# Altium PCB shkb.PcbDoc (part 1 of 3)
Units mil, origin at the board's own origin, x right, y up, seen from the top; angles counter-clockwise.
Board outline 5570.88 x 1417.33 mil, 4 copper layers (COMPONENT, GND1, GND2, SIGNAL), stack 63.78 mil thick; 142 components, 135 nets, 597 pads, 700 vias.
Unrouted connection lines stored in the file: 1.
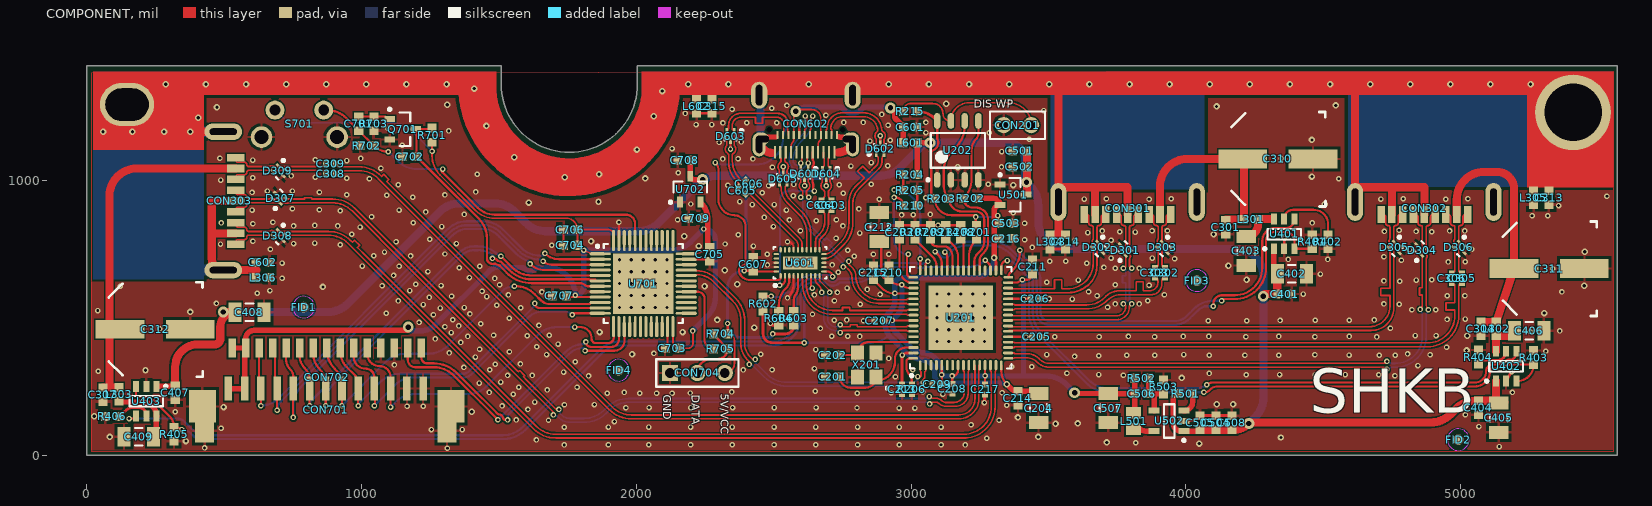
[diagram p0: COMPONENT view]
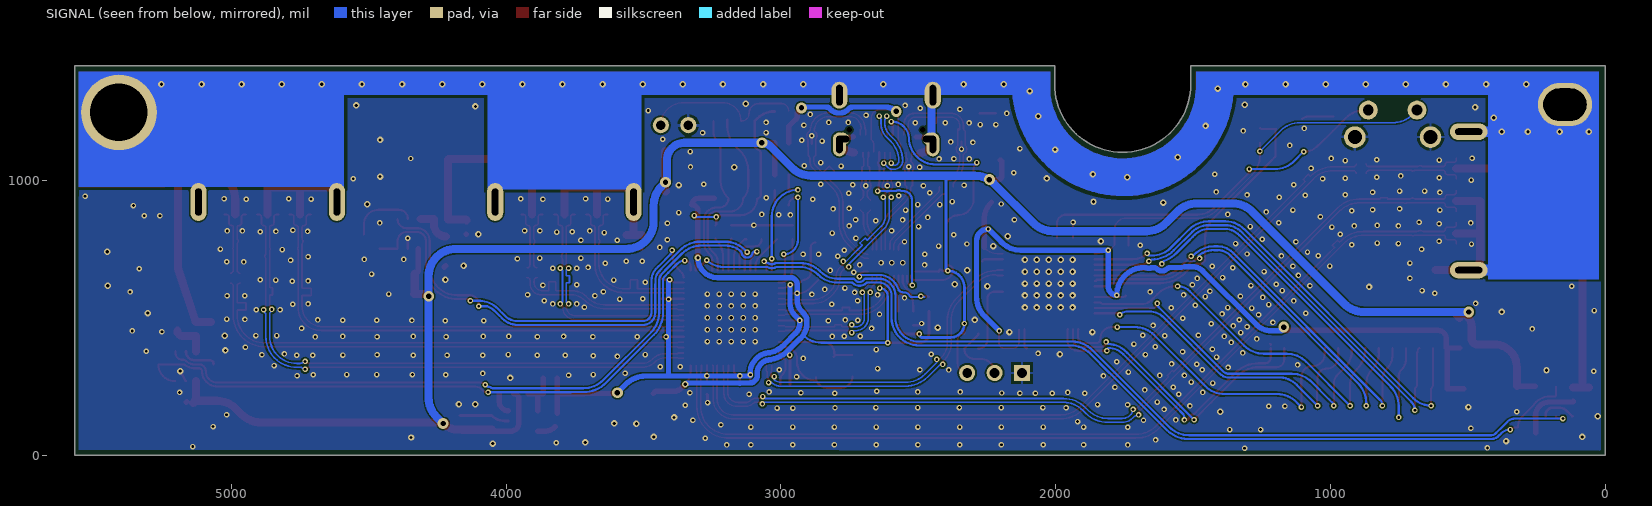
[diagram p1: SIGNAL view, seen from below]
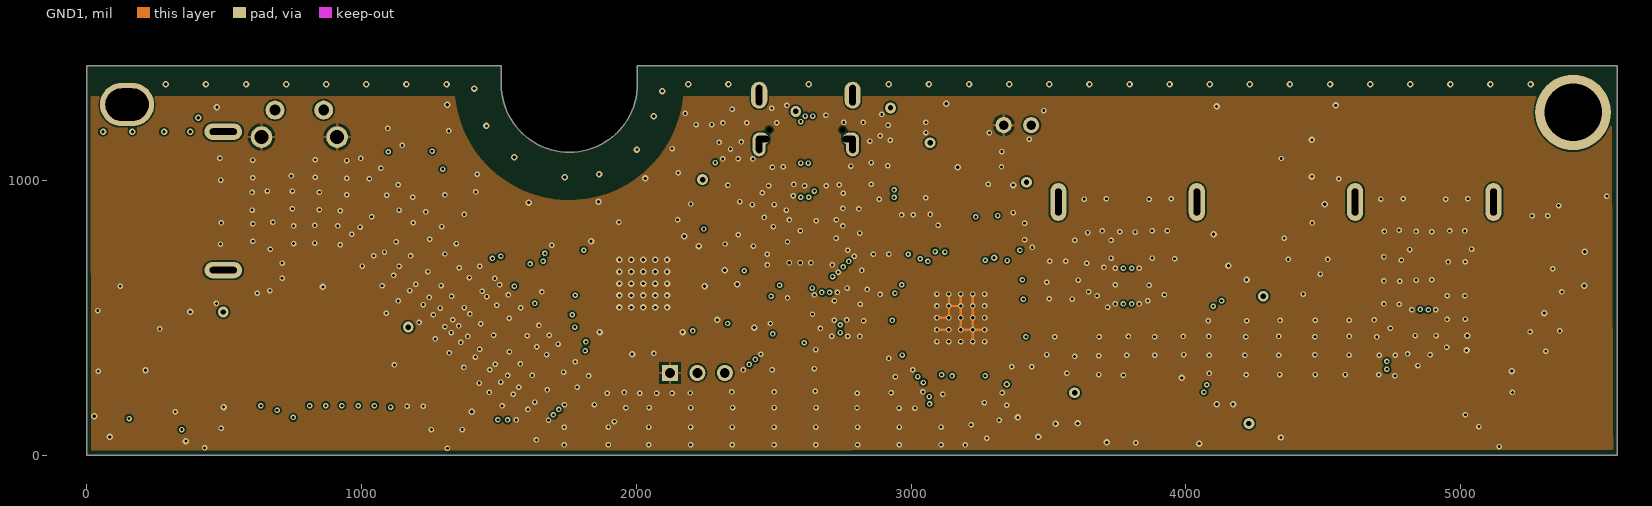
[diagram p2: GND1]
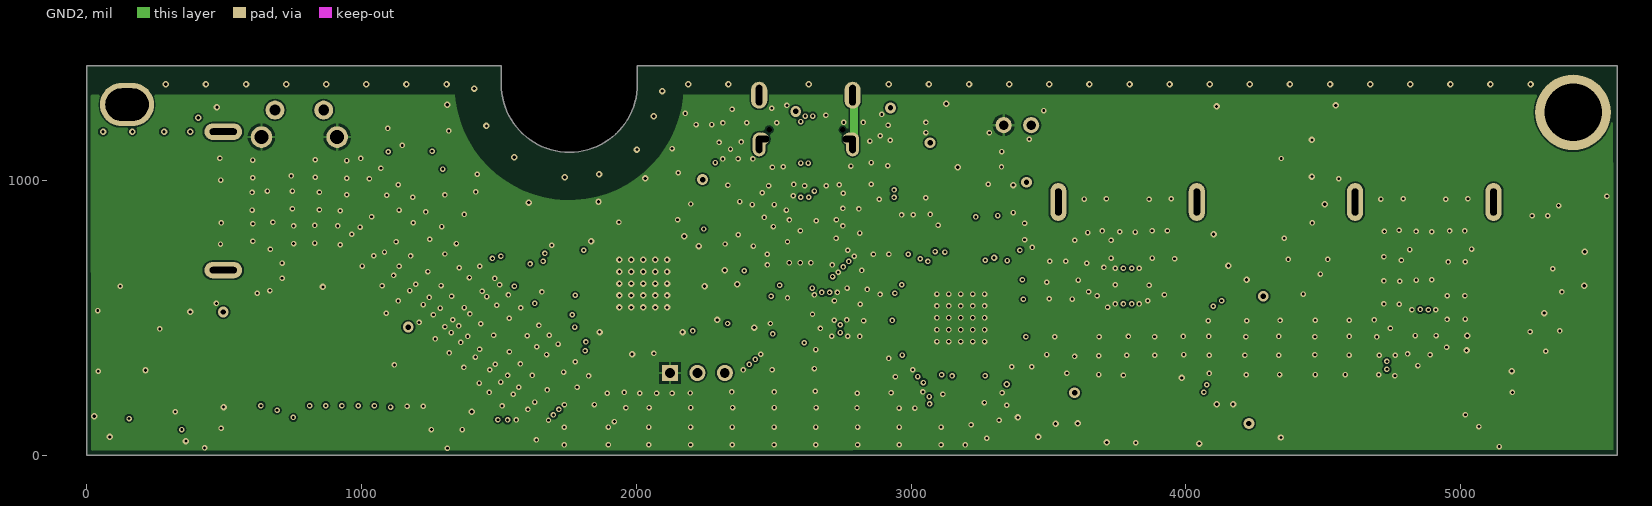
[diagram p3: GND2]

## Layer stack, top to bottom
Top Solder: solder mask 0.4, Solder Resist, Dk 3.5
COMPONENT: signal copper 1.378
Dielectric 1: core 5.5118, FR-4, Dk 4.6
GND1: signal copper 1.378
Dielectric 6: core 47.2441, Dk 4.6
GND2: signal copper 1.378
Dielectric 4: core 5.5118, Dk 4.6
SIGNAL: signal copper 1.378
Bottom Solder: solder mask 0.4, Solder Resist, Dk 3.5

## Board outline
0,0 0,1417.33 1507.88,1417.33 1507.88,1350.4 ccw(c1755.91,1350.4) 1755.91,1102.36 ccw(c1755.91,1350.4) 2003.94,1350.4 2003.94,1417.33 5570.88,1417.33 5570.88,0

## Design rules (kind name [scope] priority, off if disabled: settings)
BoardOutlineClearance [All] p1: gap=10 ignorepadtopadclearanceinfootprint=FALSE except(0: Arc-SplitContinuation Track-SplitContinuation SMDPad-SplitContinuation THPad-SplitContinuation Via-SplitContinuation Fill-SplitContinuation Poly-SplitContinuation Region-SplitContinuation Text-SplitContinuation)
Clearance Clearance_3 [InComponent('U603') vs InNet('SHELD1')] p1 off: gap=5.98 ignorepadtopadclearanceinfootprint=FALSE except(0: Arc-Hole Track-Hole SMDPad-Hole THPad-Hole Via-Hole Fill-Hole Poly-Hole Region-Hole Text-Hole)
Clearance Clearance_1 [InNamedPolygon('Component_side_GND') vs InNet('SHELD1')] p2 off: gap=40 ignorepadtopadclearanceinfootprint=FALSE except(0: Arc-Hole Track-Hole SMDPad-Hole THPad-Hole Via-Hole Fill-Hole Poly-Hole Region-Hole Text-Hole)
Clearance Clearance_2 [InNamedPolygon('S') vs InNet('SHELD1')] p3 off: gap=40 ignorepadtopadclearanceinfootprint=FALSE except(0: Arc-Hole Track-Hole SMDPad-Hole THPad-Hole Via-Hole Fill-Hole Poly-Hole Region-Hole Text-Hole)
Clearance [All] p4: gap=6 ignorepadtopadclearanceinfootprint=FALSE except(0: Arc-Hole Track-Hole SMDPad-Hole THPad-Hole Via-Hole Fill-Hole Poly-Hole Region-Hole Text-Hole)
DiffPairsRouting DiffPair_DIFF90DiffPairsRouting [InDifferentialPairClass('DIFF90')] p1: maxlimit=10 minlimit=5 mostfreqgap=8 toplayer_minwidth=6 toplayer_maxwidth=6 toplayer_prefwidth=6 midlayer2_minwidth=6 midlayer2_maxwidth=6 midlayer2_prefwidth=6 midlayer3_minwidth=6 midlayer3_maxwidth=6 midlayer3_prefwidth=6 bottomlayer_minwidth=6 bottomlayer_maxwidth=6 bottomlayer_prefwidth=6 maxuncoupledlength=0
DiffPairsRouting [All] p2: maxlimit=10 minlimit=8 mostfreqgap=8 toplayer_minwidth=6 toplayer_maxwidth=15 toplayer_prefwidth=6 midlayer2_minwidth=6 midlayer2_maxwidth=15 midlayer2_prefwidth=6 midlayer3_minwidth=6 midlayer3_maxwidth=15 midlayer3_prefwidth=6 bottomlayer_minwidth=6 bottomlayer_maxwidth=15 bottomlayer_prefwidth=6 maxuncoupledlength=500
DiffPairsRouting DiffPair_DiffPairsRouting [InDifferentialPairClass('DIFF90')] p3: maxlimit=10 minlimit=10 mostfreqgap=10 toplayer_minwidth=15 toplayer_maxwidth=15 toplayer_prefwidth=15 midlayer2_minwidth=15 midlayer2_maxwidth=15 midlayer2_prefwidth=15 midlayer3_minwidth=15 midlayer3_maxwidth=15 midlayer3_prefwidth=15 bottomlayer_minwidth=15 bottomlayer_maxwidth=15 bottomlayer_prefwidth=15 maxuncoupledlength=500
HoleSize [All] p1: absolutevalues=TRUE maxlimit=208.66 minlimit=10 maxpercent=80.000 minpercent=20.000
MatchedLengths MatchLengths_xSignals_U201_Passives [InxSignalClass('xSignals_U201_Passives_MatchLengthsClass')] p1: tolerance=5.12 checknetsindiffpair=FALSE checkdiffpairvsdiffpair=TRUE checkxsignals=TRUE checkothers=TRUE
MatchedLengths MatchLengths_xSignals_U201_CON303_1 [InxSignalClass('xSignals_U201_CON303_MatchLengthsClass')] p2: tolerance=5.12 checknetsindiffpair=FALSE checkdiffpairvsdiffpair=TRUE checkxsignals=TRUE checkothers=TRUE
MatchedLengths MatchLengths_xSignals_U201_CON303 [InxSignalClass('xSignals_U201_CON303_MatchLengthsClass')] p3: tolerance=5.12 checknetsindiffpair=FALSE checkdiffpairvsdiffpair=TRUE checkxsignals=TRUE checkothers=TRUE
MatchedLengths MatchedLengths_USB_DiffPairs_3 [InxSignalClass('USB_CHCON301_1_RX_1') OR InxSignalClass('USB_CHCON301_1_TX_1')] p4: tolerance=5 checknetsindiffpair=TRUE checkdiffpairvsdiffpair=FALSE checkxsignals=FALSE checkothers=FALSE
MatchedLengths MatchedLengths_USB_DiffPairs_2 [InxSignalClass('USB_CHCON602_1_RX_2')] p5: tolerance=5 checknetsindiffpair=TRUE checkdiffpairvsdiffpair=FALSE checkxsignals=FALSE checkothers=FALSE
MatchedLengths MatchedLengths_USB_DiffPairs_1 [InxSignalClass('USB_CHCON602_1_RX_1') OR InxSignalClass('USB_CHCON602_1_TX_1')] p6: tolerance=5 checknetsindiffpair=TRUE checkdiffpairvsdiffpair=FALSE checkxsignals=FALSE checkothers=FALSE
MatchedLengths MatchedLengths_USB_DiffPairs_602 [InxSignalClass('USB_CHCON602_1_DL')] p7: tolerance=5 checknetsindiffpair=TRUE checkdiffpairvsdiffpair=FALSE checkxsignals=FALSE checkothers=FALSE
MatchedLengths MatchedLengths_USB_DiffPairs_303 [InxSignalClass('USB_CHCON303_1_DL') OR InxSignalClass('USB_CHCON303_1_RX') OR InxSignalClass('USB_CHCON303_1_TX')] p8: tolerance=5 checknetsindiffpair=TRUE checkdiffpairvsdiffpair=FALSE checkxsignals=FALSE checkothers=FALSE
MatchedLengths MatchedLengths_USB_DiffPairs_302 [InxSignalClass('USB_CHCON302_1_DL') OR InxSignalClass('USB_CHCON302_1_RX') OR InxSignalClass('USB_CHCON302_1_TX')] p9: tolerance=5 checknetsindiffpair=TRUE checkdiffpairvsdiffpair=FALSE checkxsignals=FALSE checkothers=FALSE
MatchedLengths MatchedLengths_USB_DiffPairs_301 [InxSignalClass('USB_CHCON301_1_DL') OR InxSignalClass('USB_CHCON301_1_RX') OR InxSignalClass('USB_CHCON301_1_TX')] p10: tolerance=5 checknetsindiffpair=TRUE checkdiffpairvsdiffpair=FALSE checkxsignals=FALSE checkothers=FALSE
MatchedLengths MatchedLengths_USB_DiffPairs_201 [InxSignalClass('USB_CHU201_1_RX') OR InxSignalClass('USB_CHU201_1_TX')] p11: tolerance=5 checknetsindiffpair=TRUE checkdiffpairvsdiffpair=FALSE checkxsignals=FALSE checkothers=FALSE
MatchedLengths MatchedLengths_USB_DiffPairs_All [InxSignalClass('All xSignals')] p12: tolerance=5 checknetsindiffpair=TRUE checkdiffpairvsdiffpair=FALSE checkxsignals=FALSE checkothers=FALSE
MatchedLengths MatchedLengths_USB_DiffPairs [InxSignalClass('USB_CHCON602_1_RX') OR InxSignalClass('USB_CHCON602_1_TX')] p13: tolerance=5 checknetsindiffpair=TRUE checkdiffpairvsdiffpair=FALSE checkxsignals=FALSE checkothers=FALSE
MinimumAnnularRing [All] p1: minimumring=4
MinimumSolderMaskSliver [All] p1 off: minsoldermaskwidth=5.91
PlaneClearance PlaneClearance_PADS [(InComponent('U201') Or InComponent('U701')) and InNet('PAD1')] p1: clearance=15.75
PlaneClearance [All] p2: clearance=20
PlaneConnect Power_connection_VBUS [InNet('PAD1') And (InComponent('U201') Or InComponent('U701'))] p1: planeconnectstyle=Relief reliefexpansion=11.81 reliefentries=4 reliefconductorwidth=5.91 reliefairgap=10
PlaneConnect Power_connection_VBUS_1 [InNet('NetC601_2')] p2: planeconnectstyle=Direct reliefexpansion=20 reliefentries=4 reliefconductorwidth=10 reliefairgap=10
PlaneConnect [All] p3: planeconnectstyle=Relief reliefexpansion=20 reliefentries=4 reliefconductorwidth=10 reliefairgap=10
PolygonConnect PolygonConnect_1 [All vs IsVia] p1: connectstyle=Direct reliefconductorwidth=10 reliefentries=4 polygonreliefangle="90 Angle" airgapwidth=10
PolygonConnect [All] p2: connectstyle=Relief reliefconductorwidth=10 reliefentries=4 polygonreliefangle="90 Angle" airgapwidth=10
RoutingVias RoutingVias_1 [InDifferentialPairClass('DIFF90')] p1: holewidth=10 width=10 viastyle="Through Hole" minholewidth=10 minwidth=20 maxholewidth=10 maxwidth=20
RoutingVias [All] p2: holewidth=10 width=20 viastyle="Through Hole" minholewidth=10 minwidth=20 maxholewidth=28 maxwidth=50
SolderMaskExpansion [All] p1: expansion=4 istentingtop=FALSE
Width Width_USB_traces [InNet('MCU_D_N') Or InNet('MCU_D_P')] p1: maxlimit=6 minlimit=6 preferedwidth=6
Width [All] p2: maxlimit=140 minlimit=6 preferedwidth=8
25 further rules are at their usual default settings.

## Classes and differential pairs
component class Designator: C201 C202 C203 C204 C205 C206 C207 C208 C209 C210 C211 C212 C213 C214 C215 C216 C217 CON201 FID1 FID2 FID3 FID4 R201 R202 R203 R204 R205 R206 R207 R208 R209 R210 R214 R215 U201 U202 X201
differential pair D: +D_P -D_N
differential pair UP_SSTX: +UP_SSTX_P -UP_SSTX_N
differential pair UP_SSRX: +UP_SSRX_P -UP_SSRX_N
differential pair UP_D: +UP_D_P -UP_D_N
differential pair P3_SSTX: +P3_SSTX_P -P3_SSTX_N
differential pair P3_SSTX_PRE: +P3_SSTX_PRE_P -P3_SSTX_PRE_N
differential pair P3_SSRX: +P3_SSRX_P -P3_SSRX_N
differential pair P3_D: +P3_D_P -P3_D_N
differential pair P2_SSTX: +P2_SSTX_P -P2_SSTX_N
differential pair P2_SSTX_PRE: +P2_SSTX_PRE_P -P2_SSTX_PRE_N
differential pair P2_SSRX: +P2_SSRX_P -P2_SSRX_N
differential pair P2_D: +P2_D_P -P2_D_N
differential pair P1_SSTX: +P1_SSTX_P -P1_SSTX_N
differential pair P1_SSTX_PRE: +P1_SSTX_PRE_P -P1_SSTX_PRE_N
differential pair P1_SSRX: +P1_SSRX_P -P1_SSRX_N
differential pair P1_D: +P1_D_P -P1_D_N
differential pair UP_SSRX1: +UP_SSRX1_P -UP_SSRX1_N
differential pair UP_SSRX2: +UP_SSRX2_P -UP_SSRX2_N
differential pair UP_SSTX1_PRE: +UP_SSTX1_PRE_P -UP_SSTX1_PRE_N
differential pair UP_SSTX1: +UP_SSTX1_P -UP_SSTX1_N
differential pair UP_SSTX2_PRE: +UP_SSTX2_PRE_P -UP_SSTX2_PRE_N
differential pair UP_SSTX2: +UP_SSTX2_P -UP_SSTX2_N

## Components (designator, comment, footprint, x,y, rotation, side; value= is the part's Value field where it differs from the comment)
C201 "" C0603[1608] 2714,286 r0 top value=27pF
C202 "" C0603[1608] 2714,364 r0 top value=27pF
C203 "" C0603[1608] 2958,811 r90 top value=1uF
C204 "" C1206[3216] 3464,171 r90 top value=10uF
C205 "" C0402[1005] 3458,430 r180 top value=0.1uF
C206 "" C0402[1005] 3452,569 r180 top value=0.1uF
C207 "" C0402[1005] 2885,489 r0 top value=0.1uF
C208 "" C0402[1005] 3150,241 r90 top value=0.1uF
C209 "" C0402[1005] 3094.72,258.72 r0 top value=0.1uF
C210 "" C0603[1608] 2919.02,663.43 r270 top value=0.1uF
C211 "" C0603[1608] 3442,685 r270 top value=0.1uF
C212 "" C1206[3216] 2884,830 r270 top value=10uF
C213 "" C0402[1005] 2967,240 r90 top value=0.1uF
C214 "" C0603[1608] 3389,207 r90 top value=0.1uF
C215 "" C0603[1608] 2862.91,663.43 r270 top value=0.1uF
C216 "" C0603[1608] 3345.41,788 r180 top value=0.1uF
C217 "" C0402[1005] 3269,239 r90 top value=0.1uF
C301 "" C0603[1608] 4145,829 r90 top value=0.1uF
C302 "" C0402[1005] 3924,664 r270 top value=0.1uF
C303 "" C0402[1005] 3887,664 r270 top value=0.1uF
C304 "" C0603[1608] 5074,459.5 r90 top value=0.1uF
C305 "" C0402[1005] 5004.82,644 r90 top value=0.1uF
C306 "" C0402[1005] 4968,644 r90 top value=0.1uF
C307 "" C0603[1608] 58,220 r90 top value=0.1uF
C308 "" C0402[1005] 887.5,1024 r180 top value=0.1uF
C309 "" C0402[1005] 887.5,1061 r180 top value=0.1uF
C310 "" C_9L_9M 4335,1078 r0 top value=120-150uF
C311 "" C_9L_9M 5322.83,679 r0 top value=120-150uF
C312 "" C_9L_9M 248,458 r0 top value=120-150uF
C313 "" C0603[1608] 5322.35,937 r90 top value=0.1uF
C314 "" C0603[1608] 3562,776 r90 top value=0.1uF
C315 "" C0603[1608] 2275.5,1269.69 r90 top value=0.1uF
C401 "" C0603[1608] 4360,586 r180 top value=0.1uF
C402 "" C1206[3216] 4386,660 r180 top value=4.7uF
C403 "" C1206[3216] 4220,743 r90 top value=10uF
C404 "" C0603[1608] 5065,172 r90 top value=0.1uF
C405 "" C1206[3216] 5139,136 r90 top value=4.7uF
C406 "" C1206[3216] 5249.83,452.55 r180 top value=10uF
C407 "" C0603[1608] 321,227 r90 top value=0.1uF
C408 "" C1206[3216] 591.18,520 r180 top value=4.7uF
C409 "" C1206[3216] 188.32,66.75 r0 top value=10uF
C501 "" C0603[1608] 3395.59,1107 r0 top value=1uF
C502 "" C0603[1608] 3396,1049 r0 top value=1uF
C503 "" C0603[1608] 3346,844 r180 top value=1uF
C504 "" C0603[1608] 4110,118.11 r270 top value=1uF
C505 "" C0603[1608] 4052,118.11 r270 top value=0.1uF
C506 "" C0603[1608] 3840,224 r180 top value=18pF
C507 "" C1206[3216] 3718,171 r90 top value=10uF
C508 "" C0603[1608] 4168,118.11 r270 top value=1uF
C601 "" C0603[1608] 2997,1194 r180 top value=0.1uF
C602 "" C0603[1608] 639.77,701.3 r180 top value=0.1uF
C603 "" C0402[1005] 2710.69,910 r270 top value=0.1uF
C604 "" C0402[1005] 2673.37,910 r270 top value=0.1uF
C605 "" C0402[1005] 2384.65,962.68 r315 top value=0.1uF
C606 "" C0402[1005] 2410.08,988.15 r315 top value=0.1uF
C607 "" C0603[1608] 2425,695 r270 top value=0.1uF
C701 "" C0603[1608] 989.24,1206.6 r90 top value=4.7uF
C702 "" C0603[1608] 1174.24,1086.6 r180 top value=470nF
C703 "" C0603[1608] 2130,389 r0 top value=0.1uF
C704 "" C0603[1608] 1760,764 r0 top value=0.1uF
C705 "" C0603[1608] 2267,731 r90 top value=0.1uF
C706 "" C0603[1608] 1760,821 r0 top value=0.1uF
C707 "" C0603[1608] 1719,580 r0 top value=0.1uF
C708 "" C0603[1608] 2176,1073 r0 top value=1uF
C709 "" C0603[1608] 2216,862 r0 top value=1uF
CON201 "Header 2" HDR1X2 3437,1201 r180 top
CON301 "XKB USB-A u231-091n-4blra00-s" "XKB USB-A U231-091N-4BLRA00-S" 3787.99,921.26 r180 top
CON302 "XKB USB-A u231-091n-4blra00-s" "XKB USB-A U231-091N-4BLRA00-S" 4868.11,921.26 r180 top
CON303 "XKB USB-A u231-091n-4blra00-s" "XKB USB-A U231-091N-4BLRA00-S" 496.06,925.2 r270 top locked
CON602 "for up to 1.6mm pcb" "XKB USB-C U262-241N-4BV64" 2617.01,1220.47 r180 top locked
CON701 "HHKB-board connector" "JST S13B-ZR-SM4A-TF(LF)(SN)" 1223.55,242 r180 top locked
CON702 "HHKB-board connector JP" DF14A-15P-1.25H 872.49,177.17 r180 top locked
CON704 "Header 3" HDR1X3 2122,299 r0 top
D301 "TPD2EUSB30A" TPD2EUSB30A 3775,751 r315 top
D302 "TPD2EUSB30A" TPD2EUSB30A 3683,751 r135 top
D303 "TPD2EUSB30A" TPD2EUSB30A 3919,751 r135 top
D304 "TPD2EUSB30A" TPD2EUSB30A 4855,751 r315 top
D305 "TPD2EUSB30A" TPD2EUSB30A 4763,751 r135 top
D306 "TPD2EUSB30A" TPD2EUSB30A 4999,751 r135 top
D307 "TPD2EUSB30A" TPD2EUSB30A 700,940 r315 top
D308 "TPD2EUSB30A" TPD2EUSB30A 700,794 r135 top
D309 "TPD2EUSB30A" TPD2EUSB30A 700,1030 r135 top
D601 "TPD2EUSB30A" TPD2EUSB30A 2612,1023.62 r90 top
D602 "TPD2EUSB30A" TPD2EUSB30A 2887.22,1114.83 r270 top
D603 "TPD2EUSB30A" TPD2EUSB30A 2342.52,1161.42 r90 top
D604 "TPD2EUSB30A" TPD2EUSB30A 2691,1023.62 r90 top
D605 "TPD2EUSB30A" TPD2EUSB30A 2534.42,1006.38 r270 top
FID1 "Plug" FIDUCIAL_NORDIC 788.5,538.5 r180 top
FID2 "Plug" Fiducial_Nordic 4992,56 r270 top
FID3 "Plug" FIDUCIAL_NORDIC 4039.7,635.27 r180 top
FID4 "Plug" Fiducial_Nordic 1935,309 r270 top
L301 "Inductor" L0603[1608] 4237,858 r180 top value="220 @ 100MHz, 2A"
L302 "Inductor" L0603[1608] 5130,459.5 r90 top value="220 @ 100MHz, 2A"
L303 "Inductor" L0603[1608] 116,221 r90 top value="220 @ 100MHz, 2A"
L304 "Inductor" L0603[1608] 3505,776 r90 top value="220 @ 100MHz, 2A"
L305 "Inductor" L0603[1608] 5265.27,937 r90 top value="220 @ 100MHz, 2A"
L306 "Inductor" L0603[1608] 639.77,646.3 r180 top value="220 @ 100MHz, 2A"
L501 "Inductor" C0805 3810,124 r90 top value=2.2uH@800mA
L601 "Inductor" L0603[1608] 2997.02,1137 r0 top value="220 @ 100MHz, 2A"
L602 "Inductor" L0603[1608] 2218.5,1269.69 r90 top value="220 @ 100MHz, 2A"
Q701 "2N7002 NMOS" SOT-23-3 1149.24,1186.6 r180 top
R201 "" R0603[1608] 3238,811.02 r270 top value=10K
R202 "" R0603[1608] 3216.59,934.41 r0 top value=10K
R203 "" R0603[1608] 3112,934 r180 top value=10K
R204 "" R0603[1608] 2997,1021 r0 top value=90.9K
R205 "" R0603[1608] 2997.01,964 r0 top value=10K
R206 "" R0402[1005] 3003,240 r90 top value=9K53
R207 "" R0603[1608] 3014,811 r270 top value=10K
R208 "" R0603[1608] 3181,811.02 r270 top value=10K
R209 "" R0603[1608] 3070,811.02 r270 top value=10K
R210 "" R0603[1608] 2997,908 r180 top value=10K
R214 "" R0603[1608] 3126,811.02 r270 top value=10K
R215 "" R0603[1608] 2997,1251 r180 top value=10K
R401 "" R0603[1608] 4460,777 r90 top value=47K
R402 "" R0603[1608] 4517,777.01 r270 top value=28K7
R403 "" R0603[1608] 5266,355 r90 top value=47K
R404 "" R0603[1608] 5065,357 r90 top value=28K7
R405 "" R0603[1608] 317,76 r270 top value=47K
R406 "" R0603[1608] 92,141 r180 top value=28K7
R501 "" R0603[1608] 3999,224 r0 top value=10K
R502 "" R0603[1608] 3840,280 r0 top value=237K
R503 "" R0603[1608] 3919,248 r90 top value=200K
R602 "" R0603[1608] 2461,550 r270 top value=200K
R603 "" R0603[1608] 2573,498 r270 top value=909K
R604 "" R0603[1608] 2518,498 r270 top value=10K
R701 "Res1" R0603[1608] 1256,1165 r90 top value=10K
R702 "Res1" R0603[1608] 1019.24,1126.6 r180 top value=10K
R703 "Res1" R0603[1608] 1044.24,1206.6 r270 top value=100K
R704 "Res1" R0603[1608] 2307,442 r180 top value=10K
R705 "Res1" R0603[1608] 2307,387 r180 top value=470
S701 "SW-PB" "Wurth 431256038736" 773,1256 r180 top
U201 "TUSB8041" TUSB8041_VQFN 3180.69,499.75 r0 top locked
U202 "M24C02-WMN6TP" "STMICROELECTRONICS M24C02-WMN6TP" 3170,1109 r0 top value=2KB
U401 "TPS2552D" SOT-23-6 4358,805 r270 top
U402 "TPS2552D" SOT-23-6 5165.83,323.55 r270 top
U403 "TPS2552D" SOT-23-6 216,196 r90 top
U501 "SOT23 LDO" SOT-23-3 3371,948 r180 top
U502 "LM3674" SOT-23-5 3938.75,124.28 r90 top
U601 "hd3ss3220" HD3SS3220 2596,700 r0 top
U701 "STM32F072/F303_LQFP48" "STM32 - COMBO 7X7MM" 2024.84,624.31 r270 top
U702 "XC6206P332MR" SOT-23-3 2196,968 r270 top
X201 "XTAL" XTAL-3225 2839,328 r90 top value=24MHZ

## Footprints (in the part's own frame and the unit in brackets; to place one, negate y for a bottom-side part, rotate by r counter-clockwise, add the part's x,y. Pads: shape width x height; smd on the part's side, far side on the other; paste and mask are expansions set on the pad)
C0402[1005] [mm] "Chip Resistor, 2-Leads, Body 1,00x0,50mm, IPC Medium Density"
  rect 0.55x0.55 smd: 1(-0.45,0) 2(0.45,0)
  body extent -0.32,-0.27 0.33,0.28, height 0.5
C0603[1608] [mm] "Chip Resistor, 2-Leads, Body 1,57x0,80mm, IPC Medium Density"
  rect 0.8x0.85 smd: 1(-0.65,0) 2(0.65,0)
  body extent -0.83,-0.43 0.82,0.43, height 0.5
C0805 [mm] "Chip Capacitor, Body 2.0x1.3mm, IPC High Density"
  rect 1.1x1.4 smd: 1(-0.75,0) 2(0.75,0)
  body extent -1.1,-0.72 1.1,0.72, height 1.4
C1206[3216] [mm]
  rect 1.2x1.8 smd: 1(-1.35,0) 2(1.35,0)
  silkscreen extent -0.35,-0.8 0.35,0.8, body extent -1.6,-0.9 1.6,0.9, height 1.2
C_9L_9M [mm] "Size 9L and 9M Aluminium capacitor"
  rect 4.5x1.75 smd: 1(3.25,0) 2(-3.25,0)
  silkscreen extent -4.29,-4.39 4.39,4.34, body extent -4.8,-4.26 4.8,4.24, height 6.5
DF14A-15P-1.25H [mm]
  rect 0.7x1.8 smd: 1(8.75,-5.4) 2(7.5,-5.4) 3(6.25,-5.4) 4(5,-5.4) 5(3.75,-5.4) 6(2.5,-5.4) 7(1.25,-5.4) 8(0,-5.4) 9(-1.25,-5.4) 10(-2.5,-5.4) 11(-3.75,-5.4) 12(-5,-5.4) 13(-6.25,-5.4) 14(-7.5,-5.4) 15(-8.75,-5.4)
  rect 2.5x3 smd: 16(-11.5,0) 16(11.5,0)
FIDUCIAL_NORDIC [mm]
  round 1 smd paste+0 mask+0.5: 0(0,0)
  COMPONENT keep-out circle w0.01: c0,0 r1
Fiducial_Nordic [mm]
  round 1 smd paste+0 mask+0.5: 0(0,0)
  COMPONENT keep-out circle w0.01: c0,0 r1
HD3SS3220 [mm]
  oval 0.2x0.5 smd: 1(-1.8,-1.2) 2(-1.4,-1.2) 3(-1,-1.2) 4(-0.6,-1.2) 5(-0.2,-1.2) 6(0.2,-1.2) 7(0.6,-1.2) 8(1,-1.2) 9(1.4,-1.2) 10(1.8,-1.2) 16(1.8,1.2) 17(1.4,1.2) 18(1,1.2) 19(0.6,1.2) 20(0.2,1.2) 21(-0.2,1.2) 22(-0.6,1.2) 23(-1,1.2) 24(-1.4,1.2) 25(-1.8,1.2)
  oval 0.5x0.2 smd: 11(2.2,-0.8) 12(2.2,-0.4) 13(2.2,0) 14(2.2,0.4) 15(2.2,0.8) 26(-2.2,0.8) 27(-2.2,0.4) 28(-2.2,0) 29(-2.2,-0.4) 30(-2.2,-0.8)
  rect 3.2x1.2 smd paste-1: 31(0,0)
  silkscreen extent -2.45,-2.22 2.45,1.45, body extent -2.35,-1.35 2.35,1.35, height 0.8
HDR1X2 [mm] "Connector; Header; 2 Position"
  round 1.5 hole 0.9: 1(0,0) 2(2.54,0)
  silkscreen extent -1.27,-1.27 3.81,1.27
HDR1X3 [mm] "Connector; Header; 3 Position"
  rect 1.5x1.5 hole 0.9: 1(0,0)
  round 1.5 hole 0.9: 2(2.54,0) 3(5.08,0)
  silkscreen extent -1.27,-1.27 6.35,1.27
"JST S13B-ZR-SM4A-TF(LF)(SN)" [mm]
  rect 0.7x2.2 smd: 1(0,0) 2(1.5,0) 3(3,0) 4(4.5,0) 5(6,0) 6(7.5,0) 7(9,0) 8(10.5,0) 9(12,0) 10(13.5,0) 11(15,0) 12(16.5,0) 13(18,0)
  rect 1.75x2.2 smd: 14(-2.2,3.9) 14(20.2,3.9)
  body extent -2.23,-0.53 20.27,5.97, height 3.7
L0603[1608] [mm] "Chip Resistor, 2-Leads, Body 1,57x0,80mm, IPC Medium Density"
  rect 0.8x0.85 smd: 1(-0.65,0) 2(0.65,0)
  body extent -0.83,-0.43 0.82,0.43, height 0.5
R0402[1005] [mm] "Chip Resistor, 2-Leads, Body 1,00x0,50mm, IPC Medium Density"
  rect 0.55x0.55 smd: 1(-0.45,0) 2(0.45,0)
  body extent -0.32,-0.27 0.33,0.28, height 0.5
R0603[1608] [mm] "Chip Resistor, 2-Leads, Body 1,57x0,80mm, IPC Medium Density"
  rect 0.8x0.85 smd: 1(-0.65,0) 2(0.65,0)
  body extent -0.83,-0.43 0.82,0.43, height 0.5
SOT-23-3 [mm] "3.3v regulator, used in Windsond S2 proto 1"
  rect 1x0.55 smd: 1(1.2,-0.95) 2(1.2,0.95) 3(-1.2,0)
  silkscreen extent -0.7,-1.95 1.32,1.55, body extent -1.1,-1.5 1.45,1.5, height 1
SOT-23-5 [mm]
  rect 0.55x1 smd: 1(-0.95,-1.375) 2(0,-1.375) 3(0.95,-1.375) 4(0.95,1.375) 5(-0.95,1.375)
  silkscreen extent -1.92,-1.5 1.55,0.46, body extent -1.58,-1.5 1.63,1.5, height 0.92
SOT-23-6 [mm]
  rect 1x0.55 smd: 1(1.375,-0.95) 2(1.375,0) 3(1.375,0.95) 4(-1.375,0.95) 5(-1.375,0) 6(-1.375,-0.95)
  silkscreen extent -0.46,-1.92 1.5,1.55, body extent -1.47,-1.49 1.37,1.44, height 1.05
"STM32 - COMBO 7X7MM" [mm] "LQFP48, 7x7mm"
  oval 0.3x1.45 smd paste-5: 1(-2.75,-4.225) 2(-2.25,-4.225) 3(-1.75,-4.225) 4(-1.25,-4.225) 5(-0.75,-4.225) 6(-0.25,-4.225) 7(0.25,-4.225) 8(0.75,-4.225) 9(1.25,-4.225) 10(1.75,-4.225) 11(2.25,-4.225) 12(2.75,-4.225) 25(2.75,4.225) 26(2.25,4.225) 27(1.75,4.225) 28(1.25,4.225) 29(0.75,4.225) 30(0.25,4.225) 31(-0.25,4.225) 32(-0.75,4.225) 33(-1.25,4.225) 34(-1.75,4.225) 35(-2.25,4.225) 36(-2.75,4.225)
  oval 0.25x0.8 smd: 1(-2.75,-3.4) 2(-2.25,-3.4) 3(-1.75,-3.4) 4(-1.25,-3.4) 5(-0.75,-3.4) 6(-0.25,-3.4) 7(0.25,-3.4) 8(0.75,-3.4) 9(1.25,-3.4) 10(1.75,-3.4) 11(2.25,-3.4) 12(2.75,-3.4) 25(2.75,3.4) 26(2.25,3.4) 27(1.75,3.4) 28(1.25,3.4) 29(0.75,3.4) 30(0.25,3.4) 31(-0.25,3.4) 32(-0.75,3.4) 33(-1.25,3.4) 34(-1.75,3.4) 35(-2.25,3.4) 36(-2.75,3.4)
  oval 0.8x0.25 smd: 13(3.4,-2.75) 14(3.4,-2.25) 15(3.4,-1.75) 16(3.4,-1.25) 17(3.4,-0.75) 18(3.4,-0.25) 19(3.4,0.25) 20(3.4,0.75) 21(3.4,1.25) 22(3.4,1.75) 23(3.4,2.25) 24(3.4,2.75) 37(-3.4,2.75) 38(-3.4,2.25) 39(-3.4,1.75) 40(-3.4,1.25) 41(-3.4,0.75) 42(-3.4,0.25) 43(-3.4,-0.25) 44(-3.4,-0.75) 45(-3.4,-1.25) 46(-3.4,-1.75) 47(-3.4,-2.25) 48(-3.4,-2.75)
  oval 1.45x0.3 smd paste-5: 13(4.225,-2.75) 14(4.225,-2.25) 15(4.225,-1.75) 16(4.225,-1.25) 17(4.225,-0.75) 18(4.225,-0.25) 19(4.225,0.25) 20(4.225,0.75) 21(4.225,1.25) 22(4.225,1.75) 23(4.225,2.25) 24(4.225,2.75) 37(-4.225,2.75) 38(-4.225,2.25) 39(-4.225,1.75) 40(-4.225,1.25) 41(-4.225,0.75) 42(-4.225,0.25) 43(-4.225,-0.25) 44(-4.225,-0.75) 45(-4.225,-1.25) 46(-4.225,-1.75) 47(-4.225,-2.25) 48(-4.225,-2.75)
  rect 5.6x5.6 smd: 47(0,0)
  silkscreen extent -3.65,-4.35 3.65,3.65, body extent -4.5,-4.5 4.5,4.5, height 1.5
"STMICROELECTRONICS M24C02-WMN6TP" [mm] "SOP, 8-Leads, Body 4.90x3.90mm, Pitch 1.27mm, IPC Medium Density"
  oval 0.6x1.45 smd: 1(-1.905,-2.725) 2(-0.635,-2.725) 3(0.635,-2.725) 4(1.905,-2.725) 5(1.905,2.725) 6(0.635,2.725) 7(-0.635,2.725) 8(-1.905,2.725)
  silkscreen extent -2.88,-2.85 2.5,1.6, body extent -2.5,-3 2.5,3, height 1.75
TPD2EUSB30A [mm] "SOTFL, 3-Leads, Body 1.00x1.00mm, Pitch 0.35mm, IPC Medium Density"
  rect 0.5x0.25 smd: 1(0.5,-0.35) 2(0.5,0.35) 3(-0.5,0)
  silkscreen extent -0.43,-1.15 0.62,0.55, body extent -0.42,-0.53 0.42,0.53, height 0.5
TUSB8041_VQFN [mm]
  oval 0.25x0.9 smd: 1(-3.75,-4.4) 16(3.75,-4.4) 33(3.75,4.4) 48(-3.75,4.4)
  oval 0.25x0.95 smd: 2(-3.25,-4.375) 3(-2.75,-4.375) 4(-2.25,-4.375) 5(-1.75,-4.375) 6(-1.25,-4.375) 7(-0.75,-4.375) 8(-0.25,-4.375) 9(0.25,-4.375) 10(0.75,-4.375) 11(1.25,-4.375) 12(1.75,-4.375) 13(2.25,-4.375) 14(2.75,-4.375) 15(3.25,-4.375) 34(3.25,4.375) 35(2.75,4.375) 36(2.25,4.375) 37(1.75,4.375) 38(1.25,4.375) 39(0.75,4.375) 40(0.25,4.375) 41(-0.25,4.375) 42(-0.75,4.375) 43(-1.25,4.375) 44(-1.75,4.375) 45(-2.25,4.375) 46(-2.75,4.375) 47(-3.25,4.375)
  oval 0.9x0.25 smd: 17(4.4,-3.75) 32(4.4,3.75) 49(-4.4,3.75) 64(-4.4,-3.75)
  oval 0.95x0.25 smd: 18(4.375,-3.25) 19(4.375,-2.75) 20(4.375,-2.25) 21(4.375,-1.75) 22(4.375,-1.25) 23(4.375,-0.75) 24(4.375,-0.25) 25(4.375,0.25) 26(4.375,0.75) 27(4.375,1.25) 28(4.375,1.75) 29(4.375,2.25) 30(4.375,2.75) 31(4.375,3.25) 50(-4.375,3.25) 51(-4.375,2.75) 52(-4.375,2.25) 53(-4.375,1.75) 54(-4.375,1.25) 55(-4.375,0.75) 56(-4.375,0.25) 57(-4.375,-0.25) 58(-4.375,-0.75) 59(-4.375,-1.25) 60(-4.375,-1.75) 61(-4.375,-2.25) 62(-4.375,-2.75) 63(-4.375,-3.25)
  rect 6x6 smd paste-1000: 65(0,0)
  silkscreen extent -4.7,-5.47 4.7,4.7, body extent -4.6,-4.6 4.6,4.6, height 1
"Wurth 431256038736" [mm]
  round 1.75 hole 1: 1(-2.25,0) 2(2.25,0)
  round 2 hole 1.3: 3(-3.5,2.5) 3(3.5,2.5)
  body extent -4.2,-3.85 4.2,4, height 7.2
"XKB USB-A U231-091N-4BLRA00-S" [mm]
  rect 0.7x1.6 smd: 1(-3,1.15) 2(-1,1.15) 3(1,1.15) 4(3,1.15) 5(4,1.15) 6(2,1.15) 7(0,1.15) 8(-2,1.15) 9(-4,1.15)
  oval 1.5x3.5 hole 0.6 slot 2.5 at 90 deg: G(-6.4,0) G(6.4,0)
  body extent -7.25,-12.62 7.25,1.6, height 7.65
"XKB USB-C U262-241N-4BV64" [mm]
  rect 0.2x1.2 smd: A1(-2.63,3) A2(-2.13,3) A3(-1.63,3) A4(-1.13,3) A5(-0.63,3) A6(-0.13,3) A7(0.37,3) A8(0.87,3) A9(1.37,3) A10(1.87,3) A11(2.37,3) A12(2.87,3)
  rect 0.2x0.75 smd: B1(2.62,1.4) B2(2.12,1.4) B3(1.62,1.4) B4(1.12,1.4) B5(0.62,1.4) B6(0.12,1.4) B7(-0.38,1.4) B8(-0.88,1.4) B9(-1.38,1.4) B10(-1.88,1.4) B11(-2.38,1.4) B12(-2.88,1.4)
  oval 1.5x2.5 hole 0.6 slot 1.9 at 90 deg: G(-4.32,-2.275) G(4.32,-2.275)
  oval 1.2x2.2 hole 0.6 slot 1.6 at 90 deg: G(-4.32,2.275) G(4.32,2.275)
  round 1.2 hole 0.6 slot 1.2 at 0 deg: G(-4.013,1.778) G(4.013,1.778)
  round 0 hole 0.5 unplated: ""(-3.4,0.925) ""(3.4,0.925)
  body extent -4.63,-4.98 4.63,3.12, height 3.35
XTAL-3225 [mm]
  rect 1.4x1.2 smd: 1(-1.1,-0.85) 2(1.1,-0.85) 3(1.1,0.85) 4(-1.1,0.85)
  silkscreen extent -2.28,-2.03 -2.03,-1.78, body extent -1.6,-1.25 1.6,1.25, height 0.65

## Part data
C201 C202: library part Cap, "Capacitor", JLC=BASIC, LCSC MFG="Samsung Electro-Mechanics", LCSC Part #=C1656, MRF.Part=CL10C270JB8NNNC, Version="0603 imperial"
C203 C504 C508: library part Cap, "Capacitor", JLC=BASIC, LCSC MFG="Samsung Electro-Mechanics", LCSC Part #=C15849, MFG=KEMET, MFGPN=C0603C105K4RACTU, MRF.Part=CL10A105KB8NNNC, Version="0603 imperial"
C204 C212 C403 C406 C409 C507: library part Cap, "Capacitor", JLC=BASIC, LCSC MFG="Samsung Electro-Mechanics", LCSC Part #=C13585, MFG=KEMET, MFGPN=C1206C106K4PACTU, MRF.Part=CL31A106KBHNNNE, Version="1206 imperial"
C205 C206 C207 C208 C209 C213 C217 C302 C303 C305 C306 C308 C309 C603 C604 C605 C606: library part Cap, "Capacitor", JLC=BASIC, LCSC MFG="Samsung Electro-Mechanics", LCSC Part #=C1525, MFG=KEMET, MFGPN=C0402C104K8PACTU, MRF.Part=CL05B104KO5NNNC, Version="0402 imperial"
C210 C211 C214 C215 C216 C301 C304 C307 C313 C314 C315 C401 C404 C407 C505 C601 C602 C607: library part Cap, "Capacitor", JLC=BASIC, LCSC MFG=YAGEO, LCSC Part #=C14663, MFG=KEMET, MFGPN=C0603C104M5RACTU, MRF.Part=CC0603KRX7R9BB104, Version="0603 imperial"
C310 C311 C312: library part Cap, "Capacitor", JLC=EXTENDED, LCSC MFG=KNSCHA, LCSC Part #=C2992605, MRF.Part=XT100UF16V90RV0074, Version="SMD - 9L or 9M"
C402 C405 C408: library part Cap, "Capacitor", JLC=BASIC, LCSC MFG="Guangdong Fenghua Advanced Tech", LCSC Part #=C29823, MFG=KEMET, MFGPN=C1206C475K4PACTU, MRF.Part=1206B475K500NT, Version="1206 imperial"
C501 C502 C503 C708 C709: library part Cap, "Capacitor", LCSC MFG="Samsung Electro-Mechanics", LCSC Part #=C15849, MRF.Part=CL10A105KB8NNNC, Version="0603 imperial"
  C501 C502 C503: MFG=KEMET, MFGPN=C0603C104M5RACTU
C506: library part Cap, "Capacitor", JLC=BASIC, LCSC MFG="Samsung Electro-Mechanics", LCSC Part #=C1647, MFG=KEMET, MFGPN=C0603C180J5GACAUTO, MRF.Part=CL10C180JB8NNNC, Version="0603 imperial"
C701: library part Cap, "Capacitor", LCSC MFG="Samsung Electro-Mechanics", LCSC Part #=C19666, MRF.Part=CL10A475KO8NNNC, Version="0603 imperial"
C702: library part Cap, "Capacitor", LCSC MFG="Samsung Electro-Mechanics", LCSC Part #=C1623, MRF.Part=CL10B474KA8NNNC, Version="0603 imperial"
C703 C704 C705 C706 C707: library part Cap, "Capacitor", LCSC MFG=YAGEO, LCSC Part #=C14663, MRF.Part=CC0603KRX7R9BB104, Version="0603 imperial"
CON201: "Header, 2-Pin", LatestRevisionDate=17-Jul-2002, LatestRevisionNote="Re-released for DXP Platform.", Publisher="Altium Limited"
CON301 CON302 CON303: JLC=NONE, LCSC MFG="XKB Connectivity", LCSC Part #=C381140, MRF.Part=U231-091N-4BLRA00-S-1
CON602: library part "XKB USB-C u262-241n-4bv64", JLC=U262-241N-4BV64, LCSC MFG="XKB Connectivity", LCSC Part #=C388660, MRF.Part=U262-241N-4BV64
CON701: library part "Header 14", JLC=NONE, LCSC MFG="JST Sales America", LCSC Part #=C265326, MFG="JST Sales America Inc", MFGPN=S13B-ZR-SM4A-TF(LF)(SN), MRF.Part=S13B-ZR-SM4A-TF(LF)(SN)
CON702: library part DF14A-15P-1.25H, JLC=NONE, LCSC MFG=HRS(Hirose), LCSC Part #=C597889, MFG="Hirose Electric Co Ltd", MFGPN=DF14A-15P-1.25H(26), MRF.Part=DF14A-15P-1.25H(26)
CON704: "Header, 3-Pin", LatestRevisionDate=17-Jul-2002, LatestRevisionNote="Re-released for DXP Platform.", Publisher="Altium Limited"
D301 D302 D303 D304 D305 D306 D307 D308 D309 D601 D602 D603 D604 D605: JLC=NONE, LCSC MFG="TECH PUBLIC", LCSC Part #=C2844720, MFG="Texas Instruments", MFGPN=TPD2EUSB30ADRTR, MRF.Part=TPD2EUSB30DRTR-TP
FID1 FID2 FID3 FID4: JLC=DNP
L301 L302 L303 L304 L305 L306 L601 L602: JLC=EXTENDED, LCSC MFG="Murata Electronics", LCSC Part #=C85832, MFG="Murata Electronics North America", MFGPN=BLM18KG221SN1D, MRF.Part=BLM18KG331SN1D, Version="0603 imperial"
L501: JLC=Yes, LCSC MFG=TDK, LCSC Part #=C107322, MFG=TDK, MFGPN=MLP2012S2R2MT0S1, MRF.Part=MLP2012S2R2MT0S1
Q701: library part MOSFET-N, "N-Channel MOSFET", LCSC MFG="Changjiang Electronics Tech (CJ)", LCSC Part #=C8545, MRF.Part=2N7002
R201 R202 R203 R207 R208 R209 R210 R214 R604: library part Res1, "Resistor", JLC=BASIC, LCSC MFG="Uniroyal Elec C25804 Vishay Dale RCA060310K0FKEA 0603WAF1002T5E 10K", LCSC Part #=C25804, MFG="Vishay Dale", MFGPN=RCA060310K0FKEA, MRF.Part=0603WAF1002T5E, Version="0603 imperial"
R204: library part Res1, "Resistor", JLC=EXTENDED, LCSC MFG="Uniroyal Elec", LCSC Part #=C51222, MFG="Vishay Dale", MFGPN=CRCW060390K9FKEA, MRF.Part=TC0325D9092T5E, Version="0603 imperial"
R205 R215 R501: library part Res1, "Resistor", JLC=BASIC, LCSC MFG="Uniroyal Elec", LCSC Part #=C25804, MFG="Vishay Dale", MFGPN=RCA060310K0FKEA, MRF.Part=0603WAF1002T5E, Version="0603 imperial"
R206: library part Res1, "Resistor", JLC=EXTENDED, LCSC MFG="Uniroyal Elec", LCSC Part #=C96273, MRF.Part=0402WGF9531TCE, Version="0402 imperial"
R401 R403 R405: library part Res1, "Resistor", JLC=BASIC, LCSC MFG="Uniroyal Elec", LCSC Part #=C25819, MFG="Vishay Dale", MFGPN=RCA060347K0FKEA, MRF.Part=0603WAF4702T5E, Version="0603 imperial"
R402 R404 R406: library part Res1, "Resistor", JLC=BASIC, LCSC MFG=PANASONIC, LCSC Part #=C491124, MRF.Part=ERA3AEB2872V, Version="0603 imperial"
R502: library part Res1, "Resistor", JLC=EXTENDED, LCSC MFG="Uniroyal Elec", LCSC Part #=C22914, MFG="Vishay Dale", MFGPN=CRCW0603237KFKEA, MRF.Part=0603WAF2373T5E, Version="0603 imperial"
R503 R602: library part Res1, "Resistor", JLC=BASIC, LCSC MFG="Uniroyal Elec", LCSC Part #=C25811, MFG="Vishay Dale", MFGPN=CRCW0603200KFKEB, MRF.Part=0603WAF2003T5E, Version="0603 imperial"
R603: library part Res1, "Resistor", JLC=EXTENDED, LCSC MFG="Uniroyal Elec", LCSC Part #=C22935, MFG="Vishay Dale", MFGPN=CRCW0603909KFKEA, MRF.Part=0603WAF9093T5E, Version="0603 imperial"
R701 R702 R704: "Resistor", LCSC MFG="Uniroyal Elec", LCSC Part #=C25804, MRF.Part=0603WAF1002T5E, Version="0603 imperial"
R703: "Resistor", LCSC MFG="Uniroyal Elec", LCSC Part #=C25803, MRF.Part=0603WAF1003T5E, Version="0603 imperial"
R705: "Resistor", LCSC MFG="UNI-ROYAL(Uniroyal Elec)", LCSC Part #=C23179, MRF.Part=0603WAF4700T5E, Version="0603 imperial"
S701: "Switch", JLC=NONE, LCSC MFG="Korean Hroparts Elec", LCSC Part #=C127680, MFG="Wurth Electronics Inc", MFGPN=431256038736, MRF.Part=K2-1102AQ-C4CW-01
U201: JLC=NONE, LCSC MFG="Texas Instruments", LCSC Part #=C544686, MRF.Part=TUSB8041IRGCR
U202: library part "STMicroelectronics M24C02-WMN6TP", JLC=BASIC, LCSC MFG=STMicroelectronics, LCSC Part #=C7562, MRF.Part=M24C02-WMN6TP, Version="SO8 2KB"
U401 U402 U403: JLC=EXTENDED, LCSC MFG="Texas Instruments", LCSC Part #=C140331, MRF.Part=TPS2552DBVR-1
U501: LCSC MFG="Torex Semicon", LCSC Part #=C5446, MFG="Texas Instruments", MFGPN=TPS7A0533PDBZ, MRF.Part=XC6206P332MR
U502: JLC=NONE, LCSC MFG="Texas Instruments", LCSC Part #=C52027, MFG="Texas Instruments", MFGPN=LM3674MF-ADJ/NOPB, MRF.Part=LM3674MF-ADJ/NOPB
U601: JLC=NONE, LCSC MFG="Texas Instruments", LCSC Part #=C165155, MFG="Texas Instruments", MFGPN=HD3SS3220RNHR, MRF.Part=HD3SS3220RNHR
U701: LCSC MFG=Geehy, LCSC Part #=C915660, MRF.Part=APM32F072CBT6
U702: library part "SOT23 LDO", LCSC MFG="Torex Semicon", LCSC Part #=C5446, MRF.Part=XC6206P332MR
X201: "Crystal Oscillator", JLC=EXTENDED, LCSC MFG="Seiko Epson", LCSC Part #=C91744, MFG=EPSON, MFGPN="TSX-3225 24.0000MF18X-C0", MRF.Part=X1E0000210264, Version="3225, 18pF"

## Free pads (board coordinates)
  oval 196.85x157.48 hole 118.11 slot 157.48 at 0 deg paste-39.37: ""(145.69,1275.81)
  round 275.59 hole 208.66: ""(5409.75,1247.47)

## Via types
v1: diameter 20, hole 10, COMPONENT to SIGNAL, tented both sides, 543 vias
v2: diameter 23.62, hole 11.81, COMPONENT to SIGNAL, tented both sides, 94 vias
v3: diameter 20, hole 11.81, COMPONENT to SIGNAL, 28 vias
v4: diameter 23.62, hole 11.81, COMPONENT to SIGNAL, tented bottom, 25 vias
v5: diameter 39.37, hole 19.68, COMPONENT to SIGNAL, tented both sides, 10 vias

## Nets (pads, with @x,y where several pads share a name; then routed paths per layer and width w, separated by ;. In a path a pad name is that pad's centre, name@x,y a point inside that pad or via, vN(x,y) a via of type N, cw(c..) or ccw(c..) an arc to the next point about the centre after c; other vN are vias at no path point)
BOOT0: C701.1 R702.1 S701.1 U701.44 | length 1345.9
  COMPONENT w8: S701.1@861.58,1256 872.83,1256 cw(c872.83,1156) 943.54,1226.71 C701.1@989.24,1181.01 1042.82,1127.43 ccw(c1044.83,1129.45) R702.1@1044.83,1126.6 1046.53,1124.91 ccw(c1097,1175.38) v1(1097,1104) ; v1@1290.99,1032.6 ccw(c1356,1090.42) 1294.53,1028.86 1385.69,937.69 1422.8,900.59 ccw(c1484.42,962) 1484.42,875 1962.49,875 cw(c1962.49,842.17) 1995.32,842.17 U701.44@1995.32,790.66
  SIGNAL w8: v1@1098,1104 1131.71,1070.29 ccw(c1202.42,1141) 1202.42,1041 v1(1295,1041)
D_N: U201.2 U701.32 | length 1168.8
  COMPONENT w6: U701.32@2191.18,653.85 2213.38,653.85 ccw(c2213.38,658.7) 2216.82,655.27 cw(c2220.25,651.84) 2220.25,656.69 cw(c2220.25,572.04) 2280.11,631.89 2350.71,561.29 cw(c2280,490.58) 2380,490.58 2380,405.26 ccw(c2462.47,405.26) 2404.11,346.99 ccw(c2462.47,405.26) 2404.16,346.94 2411,340.1 v1(2411,330) ; v1@3041.9,273.1 3049.9,281.1 3049.9,302.96 3052.74,305.81 U201.2@3052.74,327.51
  SIGNAL w6: v1(2411,330) 2420.2,330 2465.85,284.35 ccw(c2546.37,364.88) 2465.91,284.29 ccw(c2546.37,364.88) 2546.37,251 3002.01,251 ccw(c3002.01,295.38) 3033.4,264 v1(3045,264)
D_P: U201.1 U701.33 | length 1146.4
  COMPONENT w6: U701.33@2191.18,673.53 2213.38,673.53 cw(c2213.38,668.68) 2216.82,672.11 ccw(c2220.25,675.54) 2220.25,670.69 2220.46,670.69 cw(c2220.46,572.54) 2289.86,641.94 2360.72,571.08 cw(c2280.37,490.73) 2394,490.73 2394,405.36 ccw(c2462.71,405.36) 2414.12,356.78 2422.9,348 v1(2433,348) ; v1@3032,283 3035.9,286.9 3035.9,302.96 3033.06,305.81 U201.1@3033.06,326.52
  SIGNAL w6: v1(2433,348) 2433,337 2475.71,294.29 ccw(c2546.42,365) 2475.77,294.23 ccw(c2546.42,365) 2546.42,265 2574,265 2638,265 3001.31,265 ccw(c3001.31,297.09) 3024,274.4 v1(3024,286)